# Altium PCB PCB1.PcbDoc (part 4 of 12)
Units mm, origin at the board's own origin, x right, y up, seen from the top; angles counter-clockwise.
Board outline 100 x 100 mm, 6 copper layers (Top Layer, Int1 (GND), Int2 (Sign), Int3 (Sign), Int4 (PWR), Bottom Layer), stack 1.538 mm thick; 614 components, 712 nets, 3014 pads, 1096 vias.
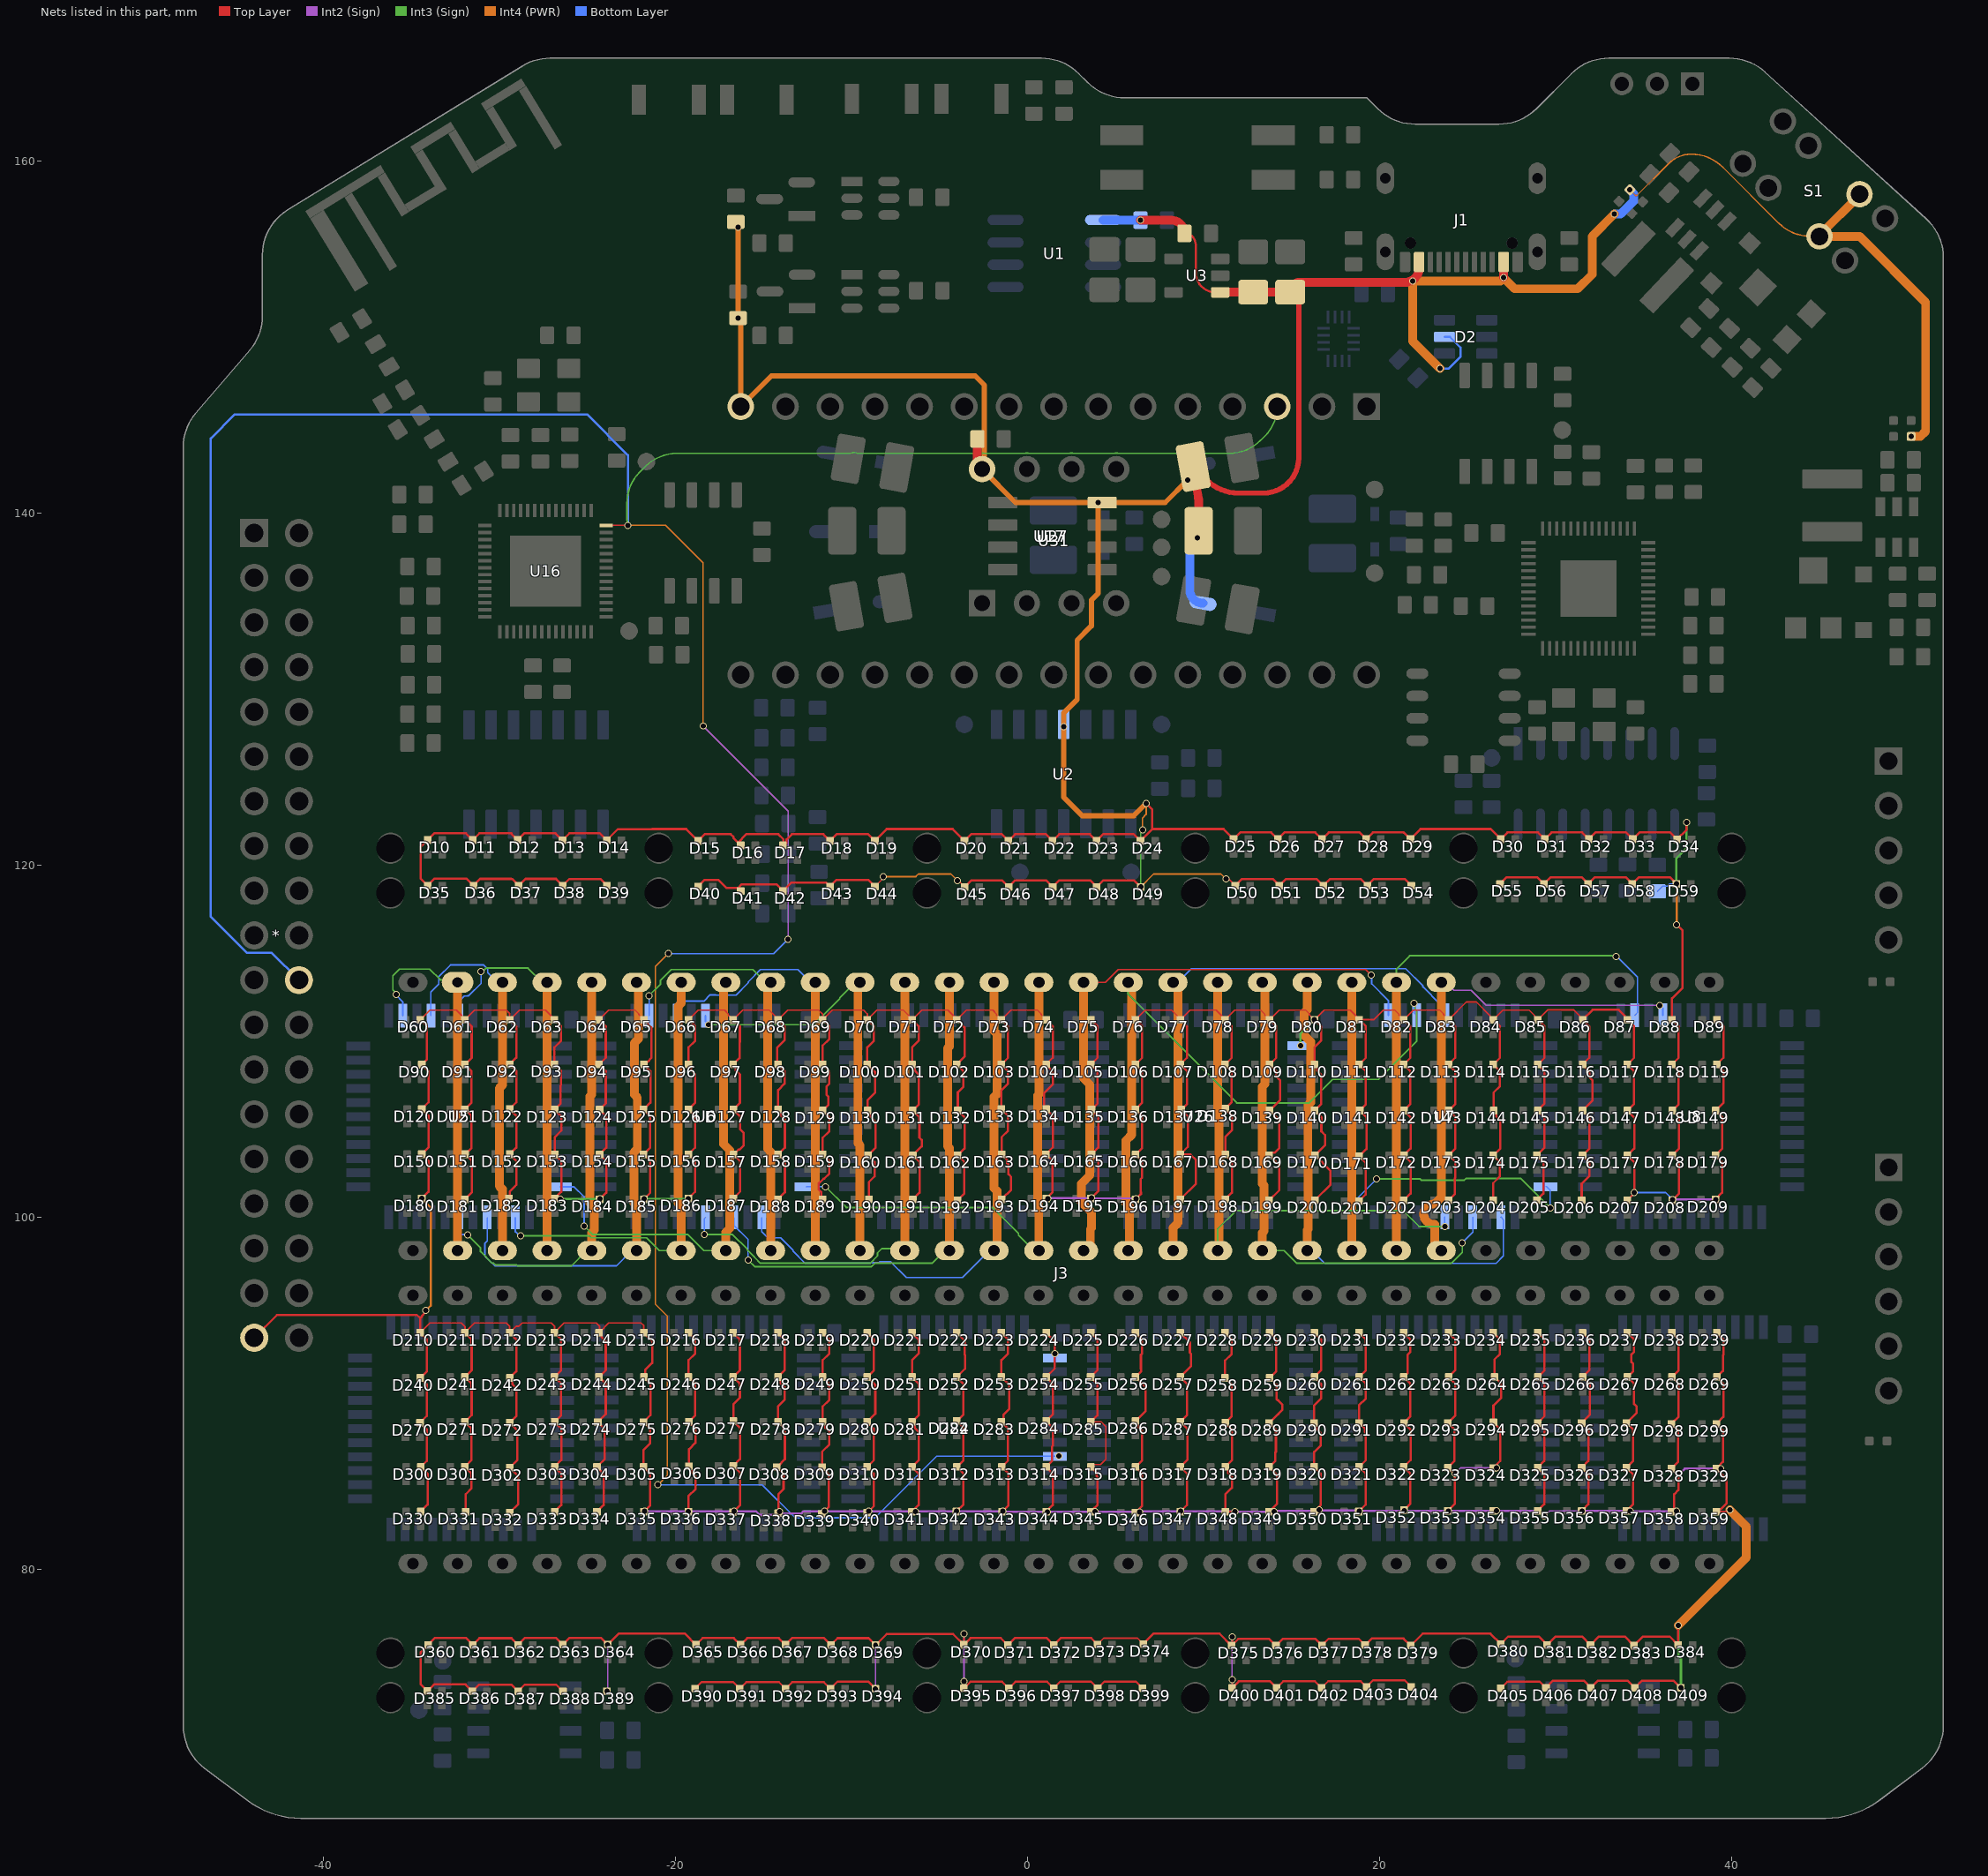
[diagram p7: the nets of this part, all layers, seen from the top]

## Via types
v1: diameter 0.4, hole 0.3, Top Layer to Bottom Layer, tented both sides, 1087 vias
v2: diameter 0.4, hole 0.3, Top Layer to Bottom Layer, 6 vias
v3: diameter 0.4, hole 0.3, Top Layer to Bottom Layer, tented top, 2 vias
v4: diameter 0.6, hole 0.5, Top Layer to Bottom Layer, 1 vias

## Nets (pads, with @x,y where several pads share a name; then routed paths per layer and width w, separated by ;. In a path a pad name is that pad's centre, name@x,y a point inside that pad or via, vN(x,y) a via of type N, cw(c..) or ccw(c..) an arc to the next point about the centre after c; other vN are vias at no path point) (continued)
ANALOG_5V: *.37 C1.2 C2.2 C20.2 C21.2 C45.2 D2.5 D5.2 D10.2 D11.2 D12.2 D13.2 D14.2 D15.2 D16.2 D17.2 D18.2 D19.2 D20.2 D21.2 D22.2 D23.2 D24.2 D25.2 D26.2 D27.2 D28.2 D29.2 D30.2 D31.2 D32.2 D33.2 D34.2 D35.2 D36.2 D37.2 D38.2 D39.2 D40.2 D41.2 D42.2 D43.2 D44.2 D45.2 D46.2 D47.2 D48.2 D49.2 D50.2 D51.2 D52.2 D53.2 D54.2 D55.2 D56.2 D57.2 D58.2 D59.2 D60.2 D61.2 D62.2 D63.2 D64.2 D65.2 D66.2 D67.2 D68.2 D69.2 D70.2 D71.2 D72.2 D73.2 D74.2 D75.2 D76.2 D77.2 D78.2 D79.2 D80.2 D81.2 D82.2 D83.2 D84.2 D85.2 D86.2 D87.2 D88.2 D89.2 D90.2 D91.2 D92.2 D93.2 D94.2 D95.2 D96.2 D97.2 D98.2 D99.2 D100.2 D101.2 D102.2 D103.2 D104.2 D105.2 D106.2 D107.2 D108.2 D109.2 D110.2 D111.2 D112.2 D113.2 D114.2 D115.2 D116.2 D117.2 D118.2 D119.2 D120.2 D121.2 D122.2 D123.2 D124.2 D125.2 D126.2 D127.2 D128.2 D129.2 D130.2 D131.2 D132.2 D133.2 D134.2 D135.2 D136.2 D137.2 D138.2 D139.2 D140.2 D141.2 D142.2 D143.2 D144.2 D145.2 D146.2 D147.2 D148.2 D149.2 D150.2 D151.2 D152.2 D153.2 D154.2 D155.2 D156.2 D157.2 D158.2 D159.2 D160.2 D161.2 D162.2 D163.2 D164.2 D165.2 D166.2 D167.2 D168.2 D169.2 D170.2 D171.2 D172.2 D173.2 D174.2 D175.2 D176.2 D177.2 D178.2 D179.2 D180.2 D181.2 D182.2 D183.2 D184.2 D185.2 D186.2 D187.2 D188.2 D189.2 D190.2 D191.2 D192.2 D193.2 D194.2 D195.2 D196.2 D197.2 D198.2 D199.2 D200.2 D201.2 D202.2 D203.2 D204.2 D205.2 D206.2 D207.2 D208.2 D209.2 D210.2 D211.2 D212.2 D213.2 D214.2 D215.2 D216.2 D217.2 D218.2 D219.2 D220.2 D221.2 D222.2 D223.2 D224.2 D225.2 D226.2 D227.2 D228.2 D229.2 D230.2 D231.2 D232.2 D233.2 D234.2 D235.2 D236.2 D237.2 D238.2 D239.2 D240.2 D241.2 D242.2 D243.2 D244.2 D245.2 D246.2 D247.2 D248.2 D249.2 D250.2 D251.2 D252.2 D253.2 D254.2 D255.2 D256.2 D257.2 D258.2 D259.2 D260.2 D261.2 D262.2 D263.2 D264.2 D265.2 D266.2 D267.2 D268.2 D269.2 D270.2 D271.2 D272.2 D273.2 D274.2 D275.2 D276.2 D277.2 D278.2 D279.2 D280.2 D281.2 D282.2 D283.2 D284.2 D285.2 D286.2 D287.2 D288.2 D289.2 D290.2 D291.2 D292.2 D293.2 D294.2 D295.2 D296.2 D297.2 D298.2 D299.2 D300.2 D301.2 D302.2 D303.2 D304.2 D305.2 D306.2 D307.2 D308.2 D309.2 D310.2 D311.2 D312.2 D313.2 D314.2 D315.2 D316.2 D317.2 D318.2 D319.2 D320.2 D321.2 D322.2 D323.2 D324.2 D325.2 D326.2 D327.2 D328.2 D329.2 D330.2 D331.2 D332.2 D333.2 D334.2 D335.2 D336.2 D337.2 D338.2 D339.2 D340.2 D341.2 D342.2 D343.2 D344.2 D345.2 D346.2 D347.2 D348.2 D349.2 D350.2 D351.2 D352.2 D353.2 D354.2 D355.2 D356.2 D357.2 D358.2 D359.2 D360.2 D361.2 D362.2 D363.2 D364.2 D365.2 D366.2 D367.2 D368.2 D369.2 D370.2 D371.2 D372.2 D373.2 D374.2 D375.2 D376.2 D377.2 D378.2 D379.2 D380.2 D381.2 D382.2 D383.2 D384.2 D385.2 D386.2 D387.2 D388.2 D389.2 D390.2 D391.2 D392.2 D393.2 D394.2 D395.2 D396.2 D397.2 D398.2 D399.2 D400.2 D401.2 D402.2 D403.2 D404.2 D405.2 D406.2 D407.2 D408.2 D409.2 J1.A4B9 J1.B4A9 JP2.2 JP4.2 R4.1 R12.1 R26.2 R48.1 R50.1 S1.2 S1.6 U1.1 U2.4 U3.1 U17.8 U24.1 U26.1 U27.8 U31.15 | length 1383.5
  Top Layer w0.09: D210.2@-34.517,93.451 -33.967,94.001 -32.177,94.001 -31.977,93.801 D211.2@-31.977,93.451 -31.427,94.001 -29.637,94.001 -29.437,93.801 D212.2@-29.437,93.451 -29.077,93.811 -28.922,93.811 -28.732,94.001 -27.08,94.001 -26.88,93.801 -26.88,93.573 D213.2@-26.997,93.456 ; D60.2@-34.517,111.231 -33.967,111.781 -32.472,111.781 -32.147,111.456 -32.147,111.296 D61.2@-32.067,111.216 ; D61.2@-31.977,111.231 -31.427,111.781 -29.637,111.781 -29.437,111.581 D62.2@-29.437,111.231 -28.887,111.781 -27.392,111.781 -27.067,111.456 -27.067,111.401 D63.2@-26.897,111.231 ; D213.2@-26.897,93.451 -26.347,94.001 -24.524,94.001 -24.324,93.801 D214.2@-24.324,93.484 ; D214.2@-24.357,93.451 D214.2@-24.324,93.484 ; D64.2@-24.357,111.231 -23.807,111.781 -22.312,111.781 -22.097,111.566 -22.097,111.511 D65.2@-21.817,111.231 ; -24.225,93.223 D214.2@-24.225,93.451 ; D215.2@-21.817,93.451 -21.817,93.847 -21.971,94.001 -23.807,94.001 D214.2@-24.324,93.484 ; D185.2@-21.817,101.033 v1(-21.792,101.058) ; D66.2@-19.277,111.231 -18.727,111.781 -17.232,111.781 -17.017,111.566 -17.017,111.511 D67.2@-16.737,111.231 -16.187,111.781 -14.692,111.781 -14.367,111.456 -14.367,111.401 D68.2@-14.197,111.231 ; D68.2@-14.172,111.206 D68.2@-14.197,111.231 ; D44.2@-8.687,118.801 -8.277,119.211 -8.277,119.307 v1(-8.218,119.366) ; v1(-4.002,119.145) -3.951,119.145 D45.2@-3.584,118.779 ; D395.2@-3.63,73.246 v1(-3.63,73.627) ; D370.2@-3.629,75.718 -3.629,76.33 -3.63,76.332 v1(-3.629,76.334) ; D74.2@1.043,111.231 0.763,111.511 0.763,111.566 0.548,111.781 -0.947,111.781 D73.2@-1.497,111.231 -1.777,111.511 -1.777,111.566 -1.992,111.781 -3.487,111.781 D72.2@-4.037,111.231 -4.207,111.401 -4.207,111.456 -4.532,111.781 -6.027,111.781 D71.2@-6.577,111.231 -6.747,111.401 -6.747,111.456 -7.072,111.781 -8.567,111.781 D70.2@-9.117,111.231 -9.117,111.564 -9.334,111.781 -11.107,111.781 D69.2@-11.657,111.231 -11.657,111.543 -11.895,111.781 -13.647,111.781 D68.2@-14.197,111.231 ; D315.2@3.583,85.823 3.72,85.961 4.133,85.961 4.439,86.266 4.439,88.117 4.173,88.383 D285.2@3.583,88.383 ; D373.2@3.964,75.739 4.324,76.099 6.227,76.099 D374.2@6.559,75.766 ; D196.2@6.123,101.023 v1(6.158,101.058) ; D76.2@6.123,111.231 6.673,111.781 8.168,111.781 8.493,111.456 8.493,111.401 D77.2@8.663,111.231 ; v1(6.416,118.775) D49.2@6.416,118.779 ; D77.2@8.698,111.196 D77.2@8.663,111.231 ; v1(11.259,119.229) 11.299,119.27 11.374,119.27 D50.2@11.793,118.851 ; D375.2@11.576,75.671 11.613,75.707 v1(11.613,76.171) ; v1(11.607,73.726) 11.613,73.721 D400.2@11.613,73.266 ; D355.2@28.97,83.333 29.261,83.041 v1(29.348,83.041) ; D86.2@31.523,111.231 31.353,111.401 31.353,111.456 31.016,111.793 29.545,111.793 D85.2@28.983,111.231 28.813,111.401 28.813,111.456 28.488,111.781 26.993,111.781 D84.2@26.443,111.231 26.273,111.401 26.273,111.456 25.487,112.241 24.913,112.241 D83.2@23.903,111.231 23.623,111.511 23.623,111.566 23.408,111.781 21.913,111.781 D82.2@21.363,111.231 21.083,111.511 21.083,111.566 20.868,111.781 20.198,111.781 19.648,111.231 D81.2@18.823,111.231 18.653,111.401 18.653,111.456 18.328,111.781 16.833,111.781 v1(16.283,111.231) 16.003,111.511 16.003,111.566 15.788,111.781 14.293,111.781 D79.2@13.743,111.231 13.463,111.511 13.463,111.566 13.248,111.781 11.753,111.781 D78.2@11.203,111.231 11.033,111.401 11.033,111.456 10.708,111.781 9.213,111.781 D77.2@8.663,111.231 ; D359.2@39.12,83.283 39.704,83.283 39.8,83.379 v1(39.884,83.379)
  Top Layer w0.127: *.37@-43.949,93.163 -42.657,94.455 -34.71,94.455 -34.517,94.263 ; D210.2@-34.59,93.378 -34.445,93.378 -34.139,93.072 -34.139,91.261 D240.2@-34.517,90.883 -34.53,90.87 -34.53,90.858 -34.492,90.858 -34.149,90.514 -34.149,90.327 -34.139,90.317 -34.139,89.789 -34.149,89.779 -34.149,88.714 D270.2@-34.53,88.333 -34.152,87.954 -34.152,86.158 D300.2@-34.483,85.827 -34.53,85.78 -34.53,85.768 -34.425,85.768 -34.095,85.438 -34.095,83.688 D330.2@-34.494,83.288 ; D210.2@-34.517,93.451 -34.517,94.263 ; D60.2@-34.517,111.231 -34.139,110.852 -34.139,108.974 D90.2@-34.43,108.683 -34.052,108.304 -34.052,106.536 D120.2@-34.43,106.158 -34.052,105.779 -34.052,103.971 D150.2@-34.43,103.593 -34.052,103.214 -34.052,101.461 v1(-34.43,101.083) ; v1(-34.195,94.708) -34.195,94.635 -34.427,94.403 -34.427,94.353 -34.517,94.263 ; D61.2@-32.067,111.216 D61.2@-31.977,111.216 ; D211.2@-32.025,93.403 -31.93,93.403 -31.599,93.072 -31.599,91.311 D241.2@-31.977,90.933 ; D331.2@-31.99,83.308 -31.93,83.368 -31.93,84.28 -31.602,84.609 -31.602,85.454 D301.2@-31.965,85.818 ; D301.2@-31.98,85.833 -31.602,86.211 -31.602,88.004 D271.2@-31.98,88.383 -31.599,88.764 -31.599,90.554 D241.2@-31.952,90.908 ; D61.2@-31.962,111.216 -31.599,110.852 -31.599,109.064 D91.2@-31.98,108.683 -31.602,108.304 -31.602,106.521 D121.2@-31.98,106.143 -31.602,105.764 -31.602,103.954 D151.2@-31.963,103.593 -31.584,103.214 -31.584,101.429 D181.2@-31.945,101.068 ; D212.2@-29.51,93.378 -29.365,93.378 -29.059,93.072 -29.059,92.357 -29.061,92.355 -29.061,91.259 D242.2@-29.437,90.883 -29.45,90.87 -29.45,90.858 -29.412,90.858 -29.286,90.731 -29.286,90.544 -29.059,90.317 -29.059,88.704 D272.2@-29.43,88.333 ; D272.2@-29.45,88.333 D272.2@-29.43,88.333 ; D182.2@-29.441,101.083 -29.422,101.101 -29.422,101.486 -29.164,101.744 ; D62.2@-29.437,111.231 -29.059,110.852 -29.059,109.082 D92.2@-29.437,108.704 -29.059,108.325 -29.059,107.61 -29.06,107.609 -29.06,106.787 -29.062,106.785 -29.062,106.536 D122.2@-29.441,106.158 -29.062,105.779 -29.062,103.968 D152.2@-29.437,103.593 -29.059,103.214 -29.059,102.177 -29.057,102.175 -29.057,101.851 -29.164,101.744 ; D302.2@-29.43,85.783 -29.007,86.206 -29.007,87.889 -29.099,87.982 -29.099,88.002 D272.2@-29.43,88.333 ; D302.2@-29.415,85.768 -28.946,85.299 -28.946,83.717 D332.2@-29.405,83.258 ; D213.2@-26.997,93.456 -26.902,93.456 D213.2@-26.897,93.451 -26.519,93.072 -26.519,91.311 D243.2@-26.897,90.933 -26.519,90.554 -26.519,88.744 D273.2@-26.88,88.383 -26.502,88.004 -26.502,86.211 D303.2@-26.88,85.833 ; D333.2@-26.91,83.308 -26.855,83.308 -26.502,83.661 -26.502,85.454 D303.2@-26.865,85.818 ; D63.2@-26.872,111.206 -26.519,110.852 -26.519,110.043 -26.897,109.664 D93.2@-26.897,108.704 -26.519,108.325 -26.519,107.514 -26.538,107.495 -26.538,106.475 D123.2@-26.88,106.133 -26.502,105.754 -26.502,104.934 -26.88,104.555 D153.2@-26.88,103.583 -26.502,103.204 -26.502,101.461 D183.2@-26.88,101.083 -26.862,101.064 -26.58,101.064 v1(-26.562,101.046) ; D388.2@-26.41,73.073 -26.789,73.451 -28.582,73.451 D387.2@-28.96,73.073 -29.347,73.459 -31.182,73.459 D386.2@-31.56,73.081 -31.95,73.47 -33.733,73.47 D385.2@-34.111,73.092 -34.49,73.47 -34.49,75.292 D360.2@-34.07,75.712 -33.672,76.11 -31.922,76.11 D361.2@-31.528,75.716 -31.15,76.095 -29.339,76.095 D362.2@-28.96,75.716 -28.567,76.11 -26.808,76.11 D363.2@-26.42,75.723 -26.033,76.11 -24.258,76.11 v1(-23.87,75.723) -23.247,76.346 -19.477,76.346 D365.2@-18.856,75.726 -18.478,76.104 -16.702,76.104 D366.2@-16.32,75.723 -15.942,76.101 -14.149,76.101 D367.2@-13.77,75.723 -13.392,76.101 -11.571,76.101 D368.2@-11.185,75.715 -10.806,76.093 -9.044,76.093 v1(-8.65,75.7) -8.016,76.334 -4.245,76.334 D370.2@-3.629,75.718 -3.25,76.096 -1.53,76.096 D371.2@-1.132,75.698 -0.733,76.096 1.079,76.096 D372.2@1.475,75.7 1.871,76.096 3.606,76.096 D373.2@3.964,75.739 ; D334.2@-24.37,83.308 -24.37,83.393 -24.102,83.661 -24.102,85.444 -24.37,85.713 -24.37,85.933 -24.052,86.251 -24.052,87.994 -24.37,88.313 -24.37,88.433 -23.979,88.824 -23.979,90.554 -24.332,90.908 -24.37,90.908 -24.37,90.92 D244.2@-24.357,90.933 -23.979,91.311 -23.979,92.977 -24.225,93.223 ; D64.2@-24.332,111.206 -23.979,110.852 -23.979,109.069 -24.33,108.718 -24.33,108.664 -23.979,108.312 -23.979,106.484 D124.2@-24.33,106.133 -23.952,105.754 -23.952,103.961 D154.2@-24.33,103.583 -23.952,103.204 -23.952,101.411 v1(-24.305,101.058) ; D39.2@-23.906,118.851 -24.285,119.229 -26.048,119.229 D38.2@-26.426,118.851 -26.809,119.234 -28.541,119.234 D37.2@-28.919,118.855 -29.294,119.229 -29.339,119.229 -29.344,119.234 -31.116,119.234 D36.2@-31.495,118.855 -31.89,119.25 -33.701,119.25 D35.2@-34.1,118.851 -34.5,119.25 -34.5,121.041 D10.2@-34.1,121.441 -33.722,121.819 -33.444,121.819 -33.432,121.831 -33.109,121.831 -33.097,121.819 -31.916,121.819 D11.2@-31.537,121.441 -31.159,121.819 -29.339,121.819 -29.339,121.793 D12.2@-28.987,121.441 -28.609,121.819 -26.826,121.819 D13.2@-26.437,121.43 -26.048,121.819 -24.306,121.819 D14.2@-23.917,121.43 -23.292,122.055 -21.356,122.055 -21.345,122.066 -19.413,122.066 D15.2@-18.737,121.391 -18.359,121.769 -16.877,121.769 -16.715,121.607 -16.715,121.545 D16.2@-16.309,121.139 ; D215.2@-21.817,93.451 -21.346,92.979 -21.346,91.736 -21.743,91.338 -21.743,90.995 -21.83,90.908 -21.792,90.908 -21.439,90.554 -21.439,88.764 D275.2@-21.83,88.373 -21.452,87.994 -21.452,87.174 -21.83,86.795 D305.2@-21.83,85.823 -21.452,85.444 -21.452,83.648 v1(-21.782,83.318) ; v1(-21.792,101.058) -21.452,101.398 -21.452,103.204 D155.2@-21.83,103.583 -21.452,103.961 -21.452,105.754 D125.2@-21.83,106.133 -21.439,106.524 -21.439,108.312 D95.2@-21.817,108.691 -21.666,108.842 -21.608,108.842 -21.379,109.071 -21.379,109.395 -21.385,109.401 -21.385,110.799 D65.2@-21.792,111.206 ; D216.2@-19.282,93.456 D216.2@-19.277,93.451 -18.899,93.072 -18.899,92.268 -19.277,91.889 D246.2@-19.277,90.933 -19.277,90.921 -19.265,90.921 -18.899,90.554 -18.899,88.754 -19.246,88.407 -19.246,88.383 -18.88,88.016 -18.88,87.198 -19.248,86.829 D306.2@-19.248,85.86 -19.097,85.708 -19.097,85.521 -18.87,85.294 -18.87,84.569 -19.28,84.159 D336.2@-19.28,83.318 ; v1(-19.28,101.058) -19.28,101.08 -18.902,101.458 -18.902,103.204 D156.2@-19.28,103.583 -18.902,103.961 -18.902,105.754 D126.2@-19.28,106.133 -18.899,106.514 -18.899,108.125 -19.126,108.352 -19.126,108.539 D96.2@-19.277,108.691 -19.277,109.658 -18.899,110.037 -18.899,110.852 D66.2@-19.252,111.206 ; D390.2@-18.91,73.223 -18.532,73.601 -16.739,73.601 D391.2@-16.36,73.223 -15.982,73.601 -14.139,73.601 D392.2@-13.76,73.223 -13.382,73.601 -11.589,73.601 D393.2@-11.21,73.223 -10.806,73.627 -9.065,73.627 v1(-8.66,73.223) ; D40.2@-18.737,118.801 -18.359,119.179 -17.579,119.179 -17.109,118.709 D41.2@-16.469,118.709 ; D217.2@-16.737,93.451 -16.359,93.072 -16.359,91.311 D247.2@-16.737,90.933 -16.75,90.92 -16.75,90.908 -16.712,90.908 -16.359,90.554 -16.359,89.755 -16.73,89.384 D277.2@-16.73,88.433 -16.73,88.403 -16.75,88.383 -16.68,88.383 -16.352,88.054 -16.352,86.266 D307.2@-16.734,85.884 -16.75,85.868 -16.75,85.818 -16.668,85.818 -16.356,85.505 -16.356,83.641 v1(-16.689,83.308) ; D187.2@-16.73,101.084 -16.347,101.467 -16.347,103.191 -16.724,103.568 D157.2@-16.726,103.569 -16.444,103.851 -16.382,103.851 -16.153,104.079 -16.153,104.818 -16.352,105.016 -16.352,105.754 D127.2@-16.73,106.133 -16.359,106.504 -16.359,108.125 -16.586,108.352 -16.586,108.553 -16.73,108.698 -16.377,109.051 -16.377,109.943 -16.359,109.961 -16.359,110.852 D67.2@-16.712,111.206 ; D16.2@-16.469,121.299 -15.998,121.769 -14.173,121.769 -13.882,121.478 D17.2@-13.882,121.205 ; D41.2@-16.309,118.549 D41.2@-16.469,118.709 ; D218.2@-14.297,93.456 -14.202,93.456 D218.2@-14.197,93.451 -13.819,93.072 -13.819,91.311 -14.172,90.958 -14.172,90.908 -14.046,90.781 -14.046,90.594 -13.819,90.367 -13.819,89.631 -14.18,89.27 D278.2@-14.18,88.383 -13.882,88.084 -13.882,87.897 -13.802,87.817 -13.802,86.263 -14.21,85.855 -14.21,85.765 -13.876,85.431 -13.876,84.573 -14.176,84.274 -14.176,83.345 -14.21,83.31 D338.2@-14.21,83.308 ; D188.2@-14.172,101.058 -13.802,101.428 -13.802,103.204 D158.2@-14.18,103.583 -13.802,103.961 -13.802,105.567 -14.029,105.794 -14.029,105.981 D128.2@-14.18,106.133 -14.18,107.235 -13.819,107.597 -13.819,108.312 -14.249,108.742 -14.247,108.745 -14.247,109.633 -13.819,110.061 -13.819,110.852 D68.2@-14.172,111.206 ; D17.2@-13.909,121.139 -13.882,121.166 D17.2@-13.882,121.205 ; D219.2@-11.657,93.451 -11.279,93.072 -11.279,92.268 -11.657,91.889 D249.2@-11.657,90.933 -11.323,90.598 -11.323,90.411 -11.279,90.367 -11.279,89.64 -11.657,89.261 -11.657,88.396 -11.67,88.383 D279.2@-11.657,88.383 -11.506,88.231 -11.506,88.044 -11.279,87.817 -11.279,87.094 -11.683,86.69 -11.683,85.831 -11.67,85.818 -11.67,85.802 -11.397,85.529 -11.397,85.487 -11.304,85.395 -11.304,83.556 v1(-11.552,83.308) ; D69.2@-11.657,111.231 -11.279,110.852 -11.279,110.137 -11.657,109.758 D99.2@-11.657,108.691 -11.318,108.351 -11.318,108.263 cw(c-11.408,108.174) -11.281,108.171 ccw(c-10.891,108.166) -11.277,108.106 cw(c-11.402,108.087) -11.275,108.087 -11.275,107.601 -11.44,107.435 -11.44,106.979 -11.323,106.861 -11.323,106.405 D129.2@-11.654,106.074 -11.275,105.695 -11.275,104.907 -11.657,104.525 D159.2@-11.657,103.585 -11.279,103.206 -11.279,102.491 -11.569,102.2 -11.595,102.2 -11.886,101.91 -11.886,101.585 -11.738,101.438 -11.738,101.083 D189.2@-11.654,100.999 ; D220.2@-9.117,93.451 -8.739,93.072 -8.739,91.311 D250.2@-9.117,90.933 -9.13,90.92 -9.13,90.908 -9.092,90.908 -8.663,90.478 -8.663,88.85 D280.2@-9.13,88.383 -8.752,88.004 -8.752,86.201 D310.2@-9.13,85.823 -9.13,85.818 -9.125,85.818 -8.752,85.444 -8.752,83.599 v1(-9.043,83.308) ; D70.2@-9.117,111.231 -8.739,110.852 -8.739,110.037 -9.117,109.658 D100.2@-9.117,108.691 -8.685,108.259 -8.685,107.083 -9.094,106.674 D130.2@-9.094,106.074 -8.943,105.922 -8.943,105.735 -8.64,105.432 -8.64,103.973 -9.066,103.547 -9.066,103.519 -8.702,103.154 -8.702,102.329 -9.03,102 D190.2@-9.03,101.063 ; D44.2@-8.687,118.801 -9.066,119.179 -10.859,119.179 D43.2@-11.237,118.801 -11.464,119.028 -13.431,119.028 D42.2@-13.909,118.549 -14.288,118.928 -16.25,118.928 D41.2@-16.469,118.709 ; D311.2@-6.577,85.823 -6.199,86.201 -6.199,87.817 -6.426,88.044 -6.426,88.231 D281.2@-6.577,88.383 -6.199,88.761 -6.199,90.554 -6.565,90.921 -6.577,90.921 D251.2@-6.577,90.933 -6.577,91.889 -6.199,92.268 -6.199,93.072 D221.2@-6.577,93.451 ; D71.2@-6.577,111.231 -6.199,110.852 -6.199,110.037 -6.577,109.658 -6.577,108.77 -6.426,108.619 -6.426,108.352 -6.199,108.125 -6.199,106.41 D131.2@-6.535,106.074 -6.156,105.695 -6.156,104.532 -6.027,104.403 -6.027,104.036 D161.2@-6.53,103.533 -6.152,103.154 -6.152,101.401 D191.2@-6.53,101.023 ; D311.2@-6.572,85.818 -6.199,85.444 -6.199,83.654 D341.2@-6.472,83.381 ; v1(-4.045,83.308) -3.659,83.694 -3.659,85.444 D312.2@-4.032,85.818 ; D312.2@-4.037,85.823 -3.659,86.201 -3.659,88.054 D282.2@-4.037,88.433 -3.659,88.811 -3.659,90.36 -3.673,90.374 -3.673,90.569 D252.2@-4.037,90.933 -3.561,91.41 -3.561,92.183 -3.582,92.205 -3.582,92.685 -3.561,92.707 -3.561,92.974 D222.2@-4.037,93.451 ; D72.2@-4.037,111.231 -3.593,110.787 -3.593,109.135 -3.975,108.753 -3.975,108.629 -3.659,108.312 -3.659,107.427 -3.975,107.111 D132.2@-3.975,106.074 -3.597,105.695 -3.597,104.98 -3.598,104.978 -3.598,103.915 -3.975,103.538 -3.975,103.528 -3.602,103.154 -3.602,101.361 D192.2@-3.964,100.999 ; D395.2@-3.63,73.246 -3.252,73.624 -1.459,73.624 D396.2@-1.08,73.246 -0.702,73.624 1.091,73.624 D397.2@1.47,73.246 1.848,73.624 3.591,73.624 D398.2@3.97,73.246 4.348,73.624 6.141,73.624 D399.2@6.52,73.246 ; D45.2@-3.584,118.779 -3.206,119.157 -1.463,119.157 D46.2@-1.084,118.779 -0.706,119.157 1.037,119.157 D47.2@1.416,118.779 1.794,119.157 3.537,119.157 D48.2@3.916,118.779 4.294,119.157 6.037,119.157 D49.2@6.416,118.779 ; D223.2@-1.502,93.456 D223.2@-1.497,93.451 -1.119,93.072 -1.119,92.268 -1.497,91.889 D253.2@-1.497,90.933 -1.497,90.921 -1.485,90.921 -1.062,90.498 -1.062,89.109 -1.383,88.788 -1.383,88.498 D283.2@-1.497,88.383 -1.119,88.004 -1.119,86.184 -1.475,85.828 -1.475,85.818 -1.102,85.444 -1.102,83.631 v1(-1.425,83.308) ; D163.2@-1.493,103.586 -1.48,103.599 -1.48,104.568 -1.119,104.929 -1.119,105.772 D133.2@-1.497,106.151 -1.497,107.218 -1.119,107.597 -1.119,108.312 D103.2@-1.497,108.691 -1.119,109.069 -1.119,110.852 D73.2@-1.49,111.224 ; D163.2@-1.48,103.573 -1.181,103.273 -1.181,103.085 -1.102,103.007 -1.102,102.457 -0.948,102.303 -0.948,101.565 D193.2@-1.437,101.076 ; D224.2@1.043,93.451 1.532,92.962 v1(1.532,92.25) ; D194.2@1.043,101.073 v1(1.133,101.073) ; D74.2@1.043,111.231 1.421,110.852 1.421,109.069 D104.2@1.043,108.691 1.421,108.312 1.421,107.559 0.917,107.056 0.917,106.276 1.421,105.772 1.421,103.981 1.043,103.603 1.043,103.578 1.409,103.212 1.409,101.439 D194.2@1.088,101.118 ; D344.2@1.198,83.438 1.421,83.661 1.421,85.444 1.048,85.818 1.048,85.828 1.368,86.148 1.368,86.981 1.421,87.034 1.421,87.867 1.374,87.914 1.374,88.102 1.056,88.42 1.056,88.446 1.421,88.811 1.421,90.554 1.068,90.908 1.068,90.958 1.532,91.422 1.532,92.243 v1@1.54,92.25 ; D225.2@3.578,93.456 D225.2@3.583,93.451 3.961,93.072 3.961,91.324 3.583,90.946 3.583,90.92 3.948,90.554 3.948,88.748 D285.2@3.596,88.396 ; D195.2@3.583,101.073 3.998,101.488 3.998,103.204 D165.2@3.62,103.583 3.998,103.961 3.998,105.754 D135.2@3.62,106.133 3.961,106.474 3.961,108.312 3.62,108.654 3.62,108.728 3.961,109.069 3.961,110.852 D75.2@3.608,111.206 ; D315.2@3.598,85.807 3.915,85.49 3.915,85.303 3.961,85.257 3.961,83.661 D345.2@3.704,83.404 ; D226.2@6.118,93.456 D226.2@6.123,93.451 6.501,93.072 6.501,92.267 6.427,92.193 6.427,91.388 6.449,91.367 6.449,91.262 D256.2@6.12,90.933 6.107,90.92 6.133,90.92 6.698,90.354 6.698,89.008 D286.2@6.123,88.433 6.107,88.417 6.139,88.417 6.274,88.281 6.274,88.094 6.501,87.867 6.501,86.201 6.128,85.828 6.128,85.818 6.501,85.444 6.501,83.611 D346.2@6.254,83.364 ; D106.2@6.123,108.691 6.501,109.069 6.501,110.852 D76.2@6.123,111.231 ; D106.2@6.126,108.688 6.501,108.312 6.501,106.514 D136.2@6.12,106.133 6.498,105.754 6.498,103.951 6.125,103.578 6.125,103.568 6.483,103.209 6.483,103.022 6.498,103.007 6.498,102.268 6.414,102.184 6.414,101.446 6.428,101.433 6.428,101.328 v1(6.158,101.058) ; D374.2@6.559,75.766 7.14,76.346 10.901,76.346 D375.2@11.576,75.671 ; v1(6.726,123.527) 7.078,123.175 7.078,122.066 ; D227.2@8.663,93.451 9.209,92.904 9.209,92.319 9.284,92.244 9.284,91.554 D257.2@8.663,90.933 8.65,90.92 8.65,90.908 8.688,90.908 9.041,90.554 9.041,88.754 D287.2@8.67,88.383 9.083,87.969 9.083,86.236 D317.2@8.67,85.823 ; D317.2@8.675,85.818 9.048,85.444 9.048,83.661 v1(8.695,83.308) ; D77.2@8.698,111.196 9.041,110.852 9.041,109.069 8.72,108.748 8.72,108.634 9.051,108.303 9.051,106.454 D137.2@8.72,106.123 9.098,105.744 9.098,104.008 8.72,103.63 8.754,103.63 8.814,103.569 9.241,103.569 9.551,103.259 9.551,101.915 D197.2@8.72,101.083 ; R4.1@8.905,155.908 cw(c8.905,155.272) 9.54,155.272 9.54,153.69 ccw(c10.672,153.69) 10.672,152.558 U3.1@10.93,152.558 ; D78.2@11.203,111.231 11.581,110.852 11.581,109.069 11.22,108.708 11.22,108.674 11.581,108.312 11.581,106.544 D138.2@11.22,106.183 11.598,105.804 11.598,104.954 11.22,104.575 D168.2@11.22,103.573 11.598,103.194 11.598,101.411 D198.2@11.295,101.108 ; D348.2@11.22,83.283 v1(11.776,83.283) ; D348.2@11.22,83.288 11.22,84.261 11.598,84.64 11.598,85.257 11.371,85.484 11.371,85.671 11.25,85.793 11.25,85.853 11.598,86.201 11.598,87.954 D288.2@11.22,88.333 11.581,88.694 11.581,90.504 D258.2@11.203,90.883 11.203,91.864 11.581,92.243 11.581,93.072 D228.2@11.248,93.406 ; D400.2@11.613,73.266 11.991,73.645 13.768,73.645 D401.2@14.14,73.273 14.511,73.645 14.604,73.645 14.611,73.651 16.311,73.651 D402.2@16.69,73.273 17.068,73.651 18.911,73.651 D403.2@19.24,73.323 19.618,73.701 21.411,73.701 D404.2@21.79,73.323 ; D375.2@11.613,75.707 11.955,76.049 13.718,76.049 D376.2@14.096,75.671 14.475,76.049 16.351,76.049 D377.2@16.715,75.685 17.093,76.064 18.797,76.064 D378.2@19.16,75.7 19.538,76.078 21.349,76.078 D379.2@21.757,75.671 22.432,76.346 26.287,76.346 D380.2@26.873,75.761 27.297,76.185 29.04,76.185 D381.2@29.51,75.715 29.98,76.185 31.485,76.185 D382.2@31.97,75.7 32.455,76.185 33.915,76.185 D383.2@34.43,75.67 34.945,76.185 36.47,76.185 D384.2@36.94,75.716 36.95,75.726 36.95,76.805 v1(36.96,76.815) ; D50.2@11.793,118.851 12.171,119.229 13.914,119.229 D51.2@14.293,118.851 14.671,119.229 16.414,119.229 D52.2@16.793,118.851 17.171,119.229 18.914,119.229 D53.2@19.293,118.851 19.671,119.229 21.414,119.229 D54.2@21.793,118.851 ; D199.2@13.72,100.983 14.287,101.551 14.287,102.965 13.741,103.512 13.741,103.554 13.871,103.684 14.039,103.684 14.287,103.933 14.287,105.527 D139.2@13.741,106.074 14.342,106.675 14.342,107.785 14.121,108.007 14.121,108.312 D109.2@13.743,108.691 14.121,109.069 14.121,110.852 D79.2@13.743,111.231 ; D229.2@13.788,93.406 14.121,93.072 14.121,91.261 D259.2@13.743,90.883 13.73,90.87 13.756,90.87 14.129,90.496 14.129,89.682 14.204,89.607 14.224,89.607 14.453,89.379 14.453,89.055 14.224,88.826 14.223,88.826 13.73,88.333 13.73,88.313 14.098,87.944 14.098,86.691 14.051,86.644 14.051,86.154 13.73,85.833 13.73,85.813 14.169,85.373 14.169,83.733 D349.2@13.856,83.419 ; D230.2@16.183,93.456 16.278,93.456 D230.2@16.283,93.451 16.661,93.072 16.661,91.311 D260.2@16.283,90.933 16.27,90.92 16.27,90.908 16.308,90.908 16.661,90.554 16.661,89.71 16.27,89.319 16.27,88.383 16.421,88.231 16.421,87.984 16.648,87.757 16.648,87.055 16.27,86.676 D320.2@16.27,85.823 16.27,85.818 16.275,85.818 16.648,85.444 16.648,83.661 D350.2@16.41,83.423 ; D110.2@16.283,108.691 16.283,109.658 16.661,110.037 16.661,110.852 v1(16.283,111.231) ; D110.2@16.3,108.709 16.434,108.575 16.434,108.352 16.661,108.125 16.661,106.434 D140.2@16.3,106.074 16.68,105.694 16.68,104.887 16.883,104.684 16.883,104.096 D170.2@16.32,103.533 17.202,102.65 17.202,101.865 D200.2@16.336,100.999 ; D321.2@18.82,85.823 19.198,86.201 19.198,87.715 19.193,87.72 19.193,87.77 19.151,87.813 19.151,87.992 D291.2@18.82,88.323 18.82,89.324 19.201,89.705 19.201,90.554 18.848,90.908 18.848,90.958 19.201,91.311 19.201,93.072 D231.2@18.823,93.451 ; D81.2@18.823,111.231 19.201,110.852 19.201,109.069 18.86,108.728 18.86,108.654 19.201,108.312 19.201,106.415 D141.2@18.86,106.074 19.238,105.695 19.238,103.891 18.86,103.513 18.86,103.433 19.198,103.094 19.198,101.308 D201.2@18.889,100.999 ; v1(18.825,83.308) 19.198,83.681 19.198,85.444 D321.2@18.825,85.818 ; D322.2@21.363,85.823 21.748,86.208 21.748,87.944 D292.2@21.37,88.323 21.741,88.694 21.741,90.554 D262.2@21.363,90.933 21.569,91.14 21.569,92.185 21.741,92.357 21.741,93.072 D232.2@21.363,93.451 ; D82.2@21.363,111.231 21.741,110.852 21.741,109.069 21.369,108.697 21.369,108.684 21.741,108.312 21.741,106.446 D142.2@21.369,106.074 21.748,105.695 21.748,103.911 D172.2@21.37,103.533 ; D322.2@21.368,85.818 21.741,85.444 21.741,83.744 D352.2@21.37,83.373 v1(21.398,83.344) ; D172.2@21.37,103.533 21.748,103.154 21.748,101.358 D202.2@21.389,100.999 ; D353.2@23.87,83.333 v1(23.89,83.313) ; D353.2@23.89,83.353 24.268,83.731 v1(24.268,85.439) 24.213,85.439 23.897,85.755 23.897,85.81 24.248,86.161 24.248,87.944 23.89,88.303 23.89,88.343 24.281,88.734 24.281,90.554 D263.2@23.903,90.933 24.281,91.311 24.281,93.072 D233.2@23.903,93.451 ; D83.2@23.903,111.231 24.281,110.852 24.281,109.069 23.92,108.708 23.92,108.674 24.281,108.312 24.281,106.434 D143.2@23.92,106.073 24.298,105.694 24.298,103.911 D173.2@23.92,103.533 24.298,103.154 24.298,102.269 24.251,102.222 24.251,101.314 D203.2@23.935,100.998 ; D234.2@26.443,93.451 26.821,93.072 26.821,92.229 26.52,91.928 D264.2@26.52,90.933 ; D114.2@26.443,108.691 26.821,109.069 26.821,110.852 D84.2@26.443,111.231 ; D204.2@26.47,100.998 26.443,101.025 26.443,101.95 26.821,102.329 26.821,103.144 26.47,103.496 26.47,103.55 26.848,103.928 26.848,105.507 26.621,105.734 26.621,105.921 D144.2@26.47,106.073 26.47,107.093 26.821,107.444 26.821,108.312 26.536,108.598 D114.2@26.47,108.598 ; D324.2@26.531,85.856 26.834,86.159 26.834,87.983 D294.2@26.455,88.361 26.455,89.312 26.898,89.755 26.898,90.554 D264.2@26.533,90.92 ; D55.2@26.833,118.95 27.212,119.328 28.947,119.328 D56.2@29.325,118.95 29.704,119.328 31.459,119.328 D57.2@31.838,118.95 32.216,119.328 33.965,119.328 D58.2@34.343,118.95 34.722,119.328 36.472,119.328 v1(36.85,118.95) ; D405.2@26.87,73.248 27.249,73.626 29.086,73.626 D406.2@29.44,73.273 29.844,73.677 31.585,73.677 D407.2@31.99,73.273 32.394,73.677 34.085,73.677 D408.2@34.49,73.273 34.894,73.677 36.685,73.677 D409.2@37.09,73.273 v1(37.108,73.292) ; D355.2@28.97,83.333 29.348,83.711 29.348,85.404 D325.2@28.97,85.783 28.97,85.818 29.005,85.818 29.348,86.161 29.348,87.944 D295.2@28.97,88.323 28.97,88.383 29.03,88.383 29.361,88.714 29.361,90.554 D265.2@28.983,90.933 29.361,91.311 29.361,93.072 D235.2@28.983,93.451 ; D205.2@28.97,101.033 29.298,101.361 29.298,103.144 28.97,103.473 28.97,103.573 29.348,103.951 29.348,105.694 D145.2@28.97,106.073 29.361,106.464 29.361,108.312 D115.2@28.996,108.678 ; D115.2@28.983,108.691 29.361,109.069 29.361,110.852 D85.2@28.983,111.231 ; D236.2@31.423,93.456 31.518,93.456 D236.2@31.523,93.451 31.901,93.072 31.901,91.311 D266.2@31.523,90.933 31.51,90.92 31.51,90.908 31.548,90.908 31.943,90.512 31.943,88.796 31.53,88.383 31.51,88.383 31.51,88.283 31.848,87.944 31.848,86.161 31.51,85.823 31.51,85.743 31.848,85.404 31.848,83.711 D356.2@31.51,83.373 ; D206.2@31.52,100.998 31.47,101.048 31.47,101.92 31.898,102.349 31.898,103.144 D176.2@31.52,103.523 31.898,103.901 31.898,105.694 D146.2@31.52,106.073 32.075,106.628 32.075,107.799 31.901,107.973 31.901,108.125 31.901,108.312 D116.2@31.523,108.691 31.901,109.069 31.901,110.852 D86.2@31.523,111.231 32.091,111.799 33.575,111.799 33.911,111.463 33.911,111.382 34.441,110.852 34.441,109.069 34.07,108.698 34.07,108.684 34.441,108.312 34.441,106.444 D147.2@34.07,106.073 34.46,105.682 34.46,103.913 D177.2@34.07,103.523 34.455,103.137 34.455,101.42 v1@34.448,101.413 ; D237.2@34.063,93.451 34.441,93.072 34.441,92.357 34.298,92.213 34.298,91.783 34.394,91.687 34.394,91.264 D267.2@34.063,90.933 34.441,90.554 34.441,89.402 34.592,89.251 34.592,88.896 34.05,88.353 34.05,88.293 34.398,87.944 34.398,86.161 34.05,85.813 34.05,85.753 34.398,85.404 34.398,83.711 D357.2@34.111,83.424 ; D207.2@34.088,100.998 v1@34.448,101.358 ; D238.2@36.603,93.451 36.981,93.072 36.981,91.311 D268.2@36.603,90.933 36.981,90.554 36.981,88.684 36.59,88.293 36.59,88.253 36.948,87.894 36.948,86.111 36.622,85.785 36.622,85.68 v1@36.811,85.492 ; D208.2@36.62,100.973 36.62,100.995 v1(36.639,101.015) ; D208.2@36.65,101.004 36.998,101.351 36.998,103.154 D178.2@36.62,103.533 36.998,103.911 36.998,105.694 D148.2@36.62,106.073 36.981,106.434 36.981,108.312 36.62,108.674 36.62,108.708 36.981,109.069 36.981,110.852 D88.2@36.603,111.231 36.603,112.449 37.203,113.049 37.203,116.304 v1(36.87,116.637) ; D358.2@36.727,83.44 36.727,84.266 36.968,84.507 v1(36.968,85.439) ; v1(37.43,122.454) 37.43,122.026 D34.2@36.886,121.483 36.499,121.87 34.754,121.87 D33.2@34.375,121.491 33.997,121.87 32.254,121.87 D32.2@31.875,121.491 31.497,121.87 29.754,121.87 D31.2@29.375,121.491 28.997,121.87 27.254,121.87 D30.2@26.875,121.491 26.3,122.066 22.318,122.066 D29.2@21.743,121.491 21.373,121.86 21.36,121.86 21.351,121.869 19.609,121.869 D28.2@19.23,121.491 18.852,121.869 17.096,121.869 D27.2@16.718,121.491 16.339,121.869 14.584,121.869 D26.2@14.205,121.491 13.827,121.869 12.071,121.869 D25.2@11.693,121.491 11.117,122.066 7.078,122.066 ; D209.2@39.07,101.023 39.091,101.023 v1(39.099,101.015) ; D209.2@39.085,101.023 39.085,101.039 39.448,101.401 39.448,103.154 39.085,103.517 39.085,103.549 39.464,103.927 39.464,105.695 D149.2@39.085,106.074 39.521,106.509 39.521,108.312 D119.2@39.143,108.691 39.521,109.069 39.521,110.852 D89.2@39.143,111.231 ; D359.2@39.13,83.308 39.256,83.434 39.387,83.434 39.695,83.742 39.695,85.157 D329.2@39.13,85.723 ; D239.2@39.143,93.451 39.521,93.072 39.521,92.192 39.495,92.166 39.495,91.285 D269.2@39.143,90.933 39.521,90.554 39.521,88.674 39.13,88.283 39.13,88.263 39.498,87.894 39.498,86.111 D329.2@39.205,85.818 ; D17.2@-13.882,121.205 -13.786,121.205 -13.712,121.279 -13.712,121.468 -13.411,121.769 -11.616,121.769 D18.2@-11.237,121.391 -10.859,121.769 -9.066,121.769 D19.2@-8.687,121.391 -8.012,122.066 -4.273,122.066 D20.2@-3.597,121.391 -3.219,121.769 -1.476,121.769 D21.2@-1.097,121.391 -0.719,121.769 1.027,121.769 D22.2@1.406,121.391 1.784,121.769 3.524,121.769 D23.2@3.903,121.391 4.281,121.769 6.024,121.769 D24.2@6.403,121.391 7.078,122.066
  Top Layer w0.3: C21.2@9.405,142.658 10.164,141.898 ccw(c11.96,143.694) 11.96,141.154 13.401,141.154 ccw(c13.401,143.144) 15.39,143.144 15.39,152.086 ccw(c14.905,152.086) 15.382,152.174 ccw(c14.905,152.086) 14.992,152.564 ccw(c14.905,152.086) C1.2@14.905,152.572
  Top Layer w0.5: R12.1@-2.865,144.225 -2.865,143.053 -2.593,142.781 U17.8@-2.593,142.511 ; v1(6.405,156.658) 8.155,156.658 cw(c8.155,155.908) R4.1@8.905,155.908 ; C21.2@9.405,142.658 9.512,141.964 9.573,141.571 9.697,140.868 ; C20.2@9.705,139.008 9.705,140.781 ; U3.1@10.93,152.558 10.937,152.565 12.798,152.565 C2.2@12.805,152.572 C1.2@14.905,152.572 cw(c15.458,152.572) 15.458,153.126 21.431,153.126 ccw(c21.431,153.925) J1.B4A9@22.23,153.925 ; v1(27.031,153.391) J1.A4B9@27.031,154.285
  Int2 (Sign) w0.09: v1(-23.91,73.081) -23.87,73.121 v1(-23.87,75.723) ; v1(-8.66,73.223) -8.65,73.233 v1(-8.65,75.7) ; v1(-3.63,73.627) -3.63,76.332 v1(-3.629,76.334) ; v1(3.62,101.11) 3.646,101.084 6.132,101.084 v1(6.158,101.058) ; v1(11.607,73.726) 11.607,76.166 v1(11.613,76.171) ; v1(24.268,85.439) 24.597,85.768 v1(26.619,85.768) ; v1(29.348,83.041) 29.374,83.041 29.657,83.324 v1(31.503,83.324)
  Int2 (Sign) w0.127: v1(-21.782,83.318) -21.767,83.303 -19.296,83.303 v1(-19.281,83.288) -19.271,83.298 -17.99,83.298 -17.98,83.308 v1(-16.689,83.308) ; v1(-16.689,83.308) -15.442,83.308 -15.233,83.099 -14.059,83.099 v1@-13.985,83.173 ; v1(-14.101,83.29) v1@-13.985,83.173 ; v1(-11.552,83.308) -9.052,83.308 -9.043,83.299 -6.39,83.299 v1(-6.381,83.29) -6.372,83.299 -4.058,83.299 -4.045,83.286 -4.024,83.308 -1.445,83.308 -1.424,83.287 1.086,83.287 v1(1.106,83.266) 1.115,83.275 3.816,83.275 v1(3.825,83.283) 3.829,83.279 6.338,83.279 6.351,83.291 8.686,83.291 8.695,83.283 8.707,83.295 11.763,83.295 v1(11.776,83.283) v1(13.993,83.283) 14.042,83.332 v1@16.55,83.332 ; v1(-11.552,83.308) -12.738,83.308 -12.873,83.173 v1@-13.985,83.173 ; v1(1.133,101.073) 1.152,101.091 3.601,101.091 v1(3.62,101.11) ; v1(16.55,83.382) v1@16.55,83.333 ; v1(29.348,83.041) 29.057,83.333 v1(26.629,83.333) 26.619,83.323 23.905,83.323 23.89,83.308 23.869,83.328 21.419,83.328 21.398,83.308 21.38,83.326 18.843,83.326 v1(18.825,83.308) 18.788,83.345 16.612,83.345 v1@16.575,83.308 ; v1(31.503,83.324) 31.512,83.316 34.219,83.316 v1(34.228,83.308) v1(36.86,83.308) ; v1(36.639,101.015) v1(39.099,101.015) ; v1(36.968,85.439) 37.042,85.439 37.329,85.726 v1(39.378,85.726) ; v1@16.55,83.333 v1@16.575,83.308 ; v1@16.55,83.332 v1@16.575,83.308
  Int3 (Sign) w0.09: v1(-21.792,101.058) v1(-19.28,101.058) ; v1(6.416,118.775) 6.416,121.822 6.517,121.924 v1(6.517,122.008)
  Int3 (Sign) w0.127: v1(-26.562,101.046) -26.555,101.052 -24.311,101.052 v1(-24.305,101.058) ; v1(15.49,109.748) 15.49,110.438 v1(16.283,111.231) ; v1(36.85,118.95) 36.85,120.403 37.43,120.982 v1(37.43,122.454) ; v1(36.96,76.815) 36.96,75.101 37.108,74.953 v1(37.108,73.292)
  Int4 (PWR) w0.09: v1(-8.218,119.366) -6.362,119.366 -6.22,119.508 -4.364,119.508 v1(-4.002,119.145) ; v1(6.416,118.775) 7.148,119.508 10.98,119.508 v1(11.259,119.229) ; v1(6.517,122.008) 6.517,122.689 6.726,122.898 v1(6.726,123.527) ; v1(34.204,158.386) 34.528,158.062 34.602,158.062 36.426,159.885 cw(c37.693,158.618) 37.693,160.41 cw(c37.693,157.87) 39.489,159.666 42.67,156.485 ccw(c44.466,158.281) 44.466,155.741 S1.6@44.982,155.741
  Int4 (PWR) w0.127: v1(-34.43,101.083) -33.917,100.569 -33.917,94.987 v1(-34.195,94.708) ; v1(36.85,118.95) 36.86,118.94 36.86,116.647 v1(36.87,116.637)
  Int4 (PWR) w0.3: v1(-16.448,156.269) -16.448,151.067 -16.309,150.928 U31.15@-16.309,146.067 -14.566,147.81 -2.985,147.81 -2.47,147.295 -2.47,142.634 U17.8@-2.593,142.511 -0.695,140.613 v1(4.005,140.613) ; v1(6.726,123.527) 6.024,122.825 3.086,122.825 2.035,123.876 v1(2.035,127.883) 2.035,128.653 2.805,129.423 2.805,132.795 3.614,133.604 3.614,135.072 4.005,135.463 v1(4.005,140.613) ; v1(9.091,141.898) 7.805,140.613 v1(4.005,140.613)
  Int4 (PWR) w0.5: v1(23.415,148.23) 21.859,149.786 v2(21.859,153.206) 26.845,153.206 v1(27.031,153.391) 27.661,152.76 31.245,152.76 32.068,153.583 32.068,155.743 v1(33.33,157.005) ; v1(36.96,76.815) 40.83,80.685 40.83,82.433 v1(39.884,83.379) ; S1.2@47.254,158.135 47.254,158.073 44.982,155.802 S1.6@44.982,155.741 47.254,155.741 51.009,151.986 51.009,144.662 50.716,144.369 v1(50.183,144.369)
  Bottom Layer w0.09: v1(34.455,101.413) 36.241,101.413 v1(36.639,101.015) ; R26.2@35.769,118.529 36.062,118.823 36.34,118.823 36.467,118.95 v1(36.85,118.95)
  Bottom Layer w0.127: v1(2.035,127.883) U2.4@2.035,128.008 ; U26.1@15.422,109.748 v1(15.49,109.748) ; v1(23.415,148.23) 23.919,148.23 24.584,148.895 24.584,149.426 23.981,150.029 D2.5@23.681,150.029
  Bottom Layer w0.5: U1.1@4.275,156.668 4.275,156.658 v1(6.405,156.658) ; v1(9.645,138.615) ccw(c9.645,138.175) 9.205,138.175 9.205,135.649 ccw(c9.956,135.649) D5.2@9.956,134.898 ; v1(33.33,157.005) 33.685,157.005 34.428,157.748 34.428,158.162 v1(34.204,158.386)
  other v1: 6.342,83.275 -16.448,151.094
AREF: *.22 U16.42 U24.8 U31.3 | length 197
  Top Layer w0.09: U16.42@-23.952,139.318 -23.949,139.321 -23.243,139.321 -23.24,139.324 v1(-22.72,139.324)
  Int2 (Sign) w0.09: v1(-18.45,127.92) -13.616,123.086 v1(-13.616,115.809)
  Int3 (Sign) w0.09: v1(-22.72,139.324) -22.778,139.69 cw(c-22.689,139.704) -22.779,139.704 -22.779,140.56 cw(c-20.239,140.56) -22.035,142.356 -21.727,142.664 cw(c-19.931,140.868) -19.931,143.408 -10.098,143.408 ccw(c-10.098,143.498) -10.057,143.418 cw(c-9.885,143.088) -9.713,143.418 ccw(c-9.672,143.498) -9.672,143.408 -2.816,143.408 ccw(c-2.817,143.498) -2.798,143.41 cw(c-2.593,142.511) -2.389,143.41 ccw(c-2.37,143.498) -2.37,143.408 -0.276,143.408 ccw(c-0.277,143.498) -0.258,143.41 cw(c-0.053,142.511) 0.151,143.41 ccw(c0.17,143.498) 0.17,143.408 2.264,143.408 ccw(c2.263,143.498) 2.282,143.41 cw(c2.487,142.511) 2.691,143.41 ccw(c2.71,143.498) 2.71,143.408 4.804,143.408 ccw(c4.803,143.498) 4.822,143.41 cw(c5.027,142.511) 5.231,143.41 ccw(c5.25,143.498) 5.25,143.408 11.436,143.408 ccw(c11.436,145.948) 13.232,144.152 13.481,144.401 ccw(c11.814,146.067) U31.3@14.171,146.067
  Int4 (PWR) w0.09: v1(-22.72,139.324) -20.584,139.324 -18.45,137.19 v1(-18.45,127.92) ; v1(-21.013,84.809) -20.479,85.343 -20.479,94.394 -21.156,95.072 -21.156,114.264 v1(-20.43,114.99)
  Bottom Layer w0.09: v1(-21.013,84.809) -15.095,84.809 -13.221,82.936 -8.677,82.936 -5.178,86.436 v1(1.759,86.436) ; v1(-20.43,114.99) -14.436,114.99 v1(-13.616,115.809)
  Bottom Layer w0.127: *.22@-41.409,113.483 -42.959,115.032 -44.36,115.032 -46.416,117.089 -46.416,144.255 -45.051,145.62 -25.032,145.62 -22.72,143.308 v1(-22.72,139.324)
B_B2: J3.2 U5.35 | length 21.9
  Int3 (Sign) w0.09: v3(-35.885,112.665) -35.885,112.748 -36.075,112.939 -36.075,113.729 -35.696,114.108 -33.985,114.108 -33.375,113.498 -32.534,113.498 J3.2@-32.392,113.356
  Int4 (PWR) w0.5: J3.2@-32.392,98.116 J3.2@-32.392,113.356
  Bottom Layer w0.09: v3(-35.885,112.665) -35.885,112.625 -35.513,112.253 U5.35@-35.513,111.468
B_B3: J3.3 U5.37 | length 22.2
  Int4 (PWR) w0.5: J3.3@-29.852,98.116 -29.852,101.602 -30.028,101.777 -30.028,107.34 -29.852,107.516 J3.3@-29.852,113.356
  Bottom Layer w0.09: U5.37@-33.913,111.468 -33.913,112.811 -33.464,113.259 -33.464,113.676 -32.801,114.339 -30.91,114.339 -30.687,114.116 -30.687,113.902 -30.141,113.356 J3.3@-29.852,113.356
B_B4: J3.4 U5.39 | length 22.6
  Int3 (Sign) w0.09: v1(-31.064,113.967) -30.986,113.967 -30.788,114.165 -28.397,114.165 -27.587,113.356 J3.4@-27.312,113.356
  Int4 (PWR) w0.5: J3.4@-27.312,98.116 J3.4@-27.312,113.356
  Bottom Layer w0.09: U5.39@-32.313,111.468 -32.313,112.278 -32.007,112.584 -31.841,112.584 -31.826,112.598 -31.758,112.598 -31.064,113.293 v1(-31.064,113.967)
B_B5: J3.5 U5.17 | length 25.1
  Int3 (Sign) w0.09: v1(-31.815,99) -31.091,98.276 -31.091,98.059 -30.426,97.394 -30.346,97.394 -30.257,97.305 -29.062,97.305 -29.007,97.25 -25.925,97.25 -25.059,98.116 J3.5@-24.772,98.116
  Int4 (PWR) w0.5: J3.5@-24.772,98.116 -24.772,99.129 -24.631,99.271 -24.631,100.568 -24.882,100.819 -24.882,106.877 -24.772,106.987 J3.5@-24.772,113.356
  Bottom Layer w0.09: U5.17@-32.313,99.998 -32.313,99.2 -32.15,99.037 -31.853,99.037 v1(-31.815,99)
B_B6: J3.6 U5.15 | length 27
  Int4 (PWR) w0.5: J3.6@-22.232,98.116 -22.232,100.682 -22.369,100.819 -22.369,103.703 -22.186,103.886 -22.186,106.812 -22.347,106.972 -22.347,109.919 -22.133,110.132 -22.133,113.257 J3.6@-22.232,113.356
  Bottom Layer w0.09: U5.15@-30.713,99.998 -30.713,98.661 -30.849,98.524 -30.849,97.817 -30.282,97.25 -23.373,97.25 -22.507,98.116 J3.6@-22.232,98.116
B_B7: J3.7 U5.13 | length 26.1
  Int3 (Sign) w0.09: v1(-28.806,98.953) -24.919,98.953 -24.804,98.838 -21.658,98.838 -20.936,98.116 J3.7@-19.692,98.116
  Int4 (PWR) w0.5: J3.7@-19.692,98.116 -19.692,100.654 -19.857,100.819 -19.857,111.997 -19.692,112.162 J3.7@-19.692,113.356
  Bottom Layer w0.09: U5.13@-29.113,99.998 -29.113,99.188 -28.878,98.953 v1(-28.806,98.953)
B_B8: J3.8 U5.11 | length 27.4
  Int3 (Sign) w0.09: v1(-25.208,99.51) -24.726,99.028 -19.308,99.028 -18.396,98.116 J3.8@-17.152,98.116
  Int4 (PWR) w0.5: J3.8@-17.152,98.116 -17.152,99.159 -16.936,99.375 -16.936,103.817 -17.29,104.171 -17.29,113.218 J3.8@-17.152,113.356
  Bottom Layer w0.09: U5.11@-26.578,101.733 -25.775,101.733 -25.208,101.166 v1(-25.208,99.51)
B_B9: J3.9 U6.35 | length 24.5
  Int3 (Sign) w0.09: v1(-21.528,112.591) -20.868,113.252 -20.868,113.477 -20.266,114.078 -15.609,114.078 -14.887,113.356 J3.9@-14.612,113.356
  Int4 (PWR) w0.5: J3.9@-14.612,98.116 -14.612,103.722 -14.776,103.886 -14.776,113.192 J3.9@-14.612,113.356
  Bottom Layer w0.09: v1(-21.528,112.591) -21.513,112.576 U6.35@-21.513,111.468
B_B10: J3.10 U6.37 | length 24.9
  Int4 (PWR) w0.5: J3.10@-12.072,98.116 J3.10@-12.072,113.356
  Bottom Layer w0.09: U6.37@-19.913,111.468 -19.913,112.228 -19.853,112.288 -18.403,112.288 -18.044,112.647 -17.74,112.647 -17.726,112.634 -16.578,112.634 -15.882,113.33 -15.882,113.382 -15.186,114.078 -13.069,114.078 -12.347,113.356 J3.10@-12.072,113.356
B_B11: J3.11 U6.39 | length 25.6
  Int3 (Sign) w0.09: v1(-18.141,110.949) -12.155,110.949 -10.677,112.427 -10.677,112.487 -9.807,113.356 J3.11@-9.532,113.356
  Int4 (PWR) w0.5: J3.11@-9.532,98.116 -9.532,104.098 -9.653,104.219 -9.653,113.235 J3.11@-9.532,113.356
  Bottom Layer w0.09: U6.39@-18.313,111.468 -18.313,111.121 v1(-18.141,110.949)
B_B12: J3.12 U6.17 | length 28.8
  Int3 (Sign) w0.09: v1(-18.376,99.028) -16.768,99.028 -15.948,98.207 -15.948,98.157 -15.521,97.731 -15.521,97.729 -15.186,97.394 -8.958,97.394 -8.535,97.817 -8.535,97.988 -8.296,98.228 -7.104,98.228 J3.12@-6.992,98.116
  Int4 (PWR) w0.5: J3.12@-6.992,98.116 -6.992,99.953 -6.992,103.999 -6.994,104.002 -6.994,108.539 -6.992,108.541 J3.12@-6.992,113.356
  Bottom Layer w0.09: v1(-18.376,99.028) -18.376,99.935 U6.17@-18.313,99.998
B_B13: J3.13 U6.15 | length 30.1
  Int3 (Sign) w0.09: v1(-15.893,97.577) -15.521,97.204 -15.266,97.204 ; -15.265,97.204 -8.88,97.204 -8.69,97.394 -5.449,97.394 -4.727,98.116 J3.13@-4.452,98.116
  Int4 (PWR) w0.5: J3.13@-4.452,98.116 -4.452,103.943 -4.561,104.051 -4.561,109.602 -4.452,109.71 J3.13@-4.452,113.356
  Bottom Layer w0.09: U6.15@-16.713,99.998 -16.713,99.573 -15.893,98.753 v1(-15.893,97.577)
B_B14: J3.14 U6.13 | length 31.3
  Int4 (PWR) w0.5: J3.14@-1.912,98.116 -1.751,98.277 -1.751,101.501 -1.915,101.665 -1.915,106.853 -1.75,107.018 -1.75,110.421 -1.912,110.583 J3.14@-1.912,113.356
  Bottom Layer w0.09: U6.13@-15.113,99.998 -15.113,99.188 -14.763,98.838 -14.038,98.838 -13.342,98.142 -13.342,98.09 -12.646,97.394 -8.958,97.394 -8.93,97.422 -8.474,97.422 -8.423,97.473 -7.783,97.473 -6.902,96.591 -3.712,96.591 -2.187,98.116 J3.14@-1.912,98.116
B_B15: J3.15 U6.11 | length 30.1
  Int3 (Sign) w0.09: v1(-11.495,101.748) -10.312,100.565 -2.013,100.565 -0.533,99.085 -0.533,99.001 0.353,98.116 J3.15@0.628,98.116
  Int4 (PWR) w0.5: J3.15@0.628,98.116 0.625,98.119 0.625,100.765 0.556,100.834 0.556,106.921 0.628,106.992 J3.15@0.628,113.356
  Bottom Layer w0.09: U6.11@-12.578,101.733 -12.563,101.748 v1(-11.495,101.748)
B_B16: J3.16 U7.35 | length 35.5
  Top Layer w0.09: J3.16@3.168,113.356 4.412,113.356 5.134,114.078 19.206,114.078 v1(19.524,113.76)
  Int4 (PWR) w0.5: J3.16@3.168,98.116 3.28,98.116 3.557,98.393 3.557,99.342 3.618,99.403 3.618,100.295 3.043,100.871 3.043,101.91 3.527,102.395 3.527,107.557 3.168,107.916 J3.16@3.168,113.356
  Bottom Layer w0.09: v1(19.524,113.76) 19.542,113.742 19.542,113.267 20.487,112.322 U7.35@20.487,111.483
B_B17: J3.17 U7.37 | length 39.6
  Int3 (Sign) w0.09: J3.17@5.708,113.356 5.708,112.671 11.872,106.507 15.983,106.507 17.317,107.841 19.936,107.841 22.087,109.992 22.087,111.778 22.003,111.862 22.003,112.099 v1(21.944,112.158)
  Int4 (PWR) w0.5: J3.17@5.708,98.116 5.77,98.178 5.77,100.63 5.581,100.819 5.581,104.375 5.911,104.706 5.911,113.152 J3.17@5.708,113.356
  Bottom Layer w0.09: v1(21.944,112.158) 21.944,111.626 U7.37@22.087,111.483
B_B18: J3.18 U7.39 | length 32.6
  Int4 (PWR) w0.5: J3.18@8.248,98.116 8.248,99.404 8.541,99.697 8.541,113.079 8.264,113.356 J3.18@8.248,113.356
  Bottom Layer w0.09: J3.18@8.248,113.356 8.523,113.356 9.299,114.132 21.468,114.132 22.451,113.148 22.451,113.096 23.435,112.113 23.482,112.113 23.687,111.908 U7.39@23.687,111.483
B_B19: J3.19 U7.17 | length 30.8
  Int3 (Sign) w0.09: J3.19@10.788,98.116 10.788,99.348 11.819,100.38 17.186,100.38 17.191,100.385 21.323,100.385 22.223,99.486 v1(23.69,99.486)
  Int4 (PWR) w0.5: J3.19@10.788,98.116 10.788,98.322 10.859,98.393 10.859,105.7 10.788,105.772 J3.19@10.788,113.356
  Bottom Layer w0.09: U7.17@23.687,100.013 23.69,100.01 v1(23.69,99.486)
B_B20: J3.20 U7.15 | length 29.6
  Int3 (Sign) w0.09: J3.20@13.328,98.116 14.572,98.116 15.294,97.394 24.062,97.394 24.687,98.019 v1(24.687,98.558)
  Int4 (PWR) w0.5: J3.20@13.328,98.116 13.328,99.13 13.43,99.232 13.43,101.812 13.32,101.922 13.32,107.428 13.464,107.572 13.464,113.219 J3.20@13.328,113.356
  Bottom Layer w0.09: v1(24.687,98.558) 25.287,99.158 U7.15@25.287,100.013
B_B21: J3.21 U7.13 | length 29.5
  Int4 (PWR) w0.5: J3.21@15.868,98.116 15.868,99.27 15.933,99.335 15.933,102.912 15.915,102.929 15.915,106.382 16.067,106.533 16.067,109.987 15.706,110.348 15.706,111.628 15.876,111.798 15.876,113.347 J3.21@15.868,113.356
  Bottom Layer w0.09: J3.21@15.868,98.116 16.143,98.116 16.872,97.386 26.606,97.386 27.025,97.805 27.025,99.875 U7.13@26.887,100.013
B_B22: J3.22 U7.11 | length 31.9
  Int3 (Sign) w0.09: v1(19.812,102.196) 22.276,102.196 22.352,102.12 24.8,102.12 24.886,102.206 28.015,102.206 v1(29.681,100.54)
  Int4 (PWR) w0.5: J3.22@18.408,98.116 J3.22@18.408,113.356
  Bottom Layer w0.09: J3.22@18.408,98.116 18.408,100.766 19.812,102.17 v1(19.812,102.196) ; U7.11@29.422,101.748 29.476,101.748 29.681,101.543 v1(29.681,100.54)
B_B23: J3.23 U8.35 | length 32.7
  Int3 (Sign) w0.09: J3.23@20.948,113.356 20.948,114.115 21.699,114.866 33.366,114.866 v1(33.421,114.811)
  Int4 (PWR) w0.5: J3.23@20.948,98.116 J3.23@20.948,113.356
  Bottom Layer w0.09: v1(33.421,114.811) 33.488,114.811 34.645,113.655 34.645,111.64 U8.35@34.487,111.483
B_B24: J3.24 U8.37 | length 29.9
  Int2 (Sign) w0.09: J3.24@23.488,113.356 23.763,113.356 24.217,112.902 25.185,112.902 26.036,112.051 v1(35.91,112.051)
  Int4 (PWR) w0.5: J3.24@23.488,98.116 23.39,98.116 23.113,98.393 23.113,99.603 cw(c23.082,100.179) 23.113,100.755 23.488,101.13 J3.24@23.488,113.356
  Bottom Layer w0.09: v1(35.91,112.051) 36.087,111.874 U8.37@36.087,111.483